# Altium PCB 起跑突击V4.0.PcbDoc
Units mm, origin at the board's own origin, x right, y up, seen from the top; angles counter-clockwise.
Board outline 152.4 x 101.6 mm, 2 copper layers (Top Layer, Bottom Layer); 9 components, 6 nets, 28 pads, 1 vias.
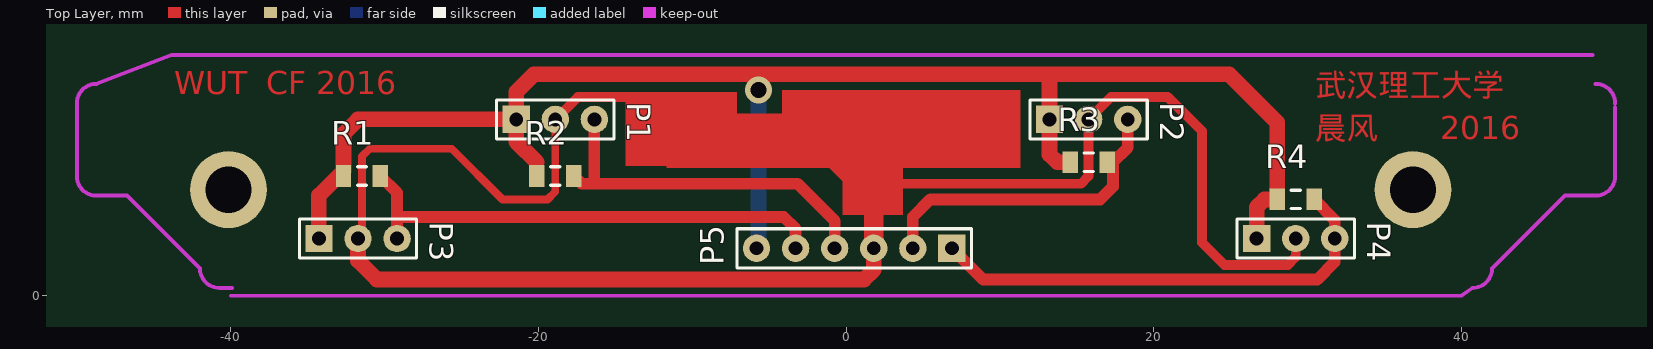
[diagram p0: Top Layer view]
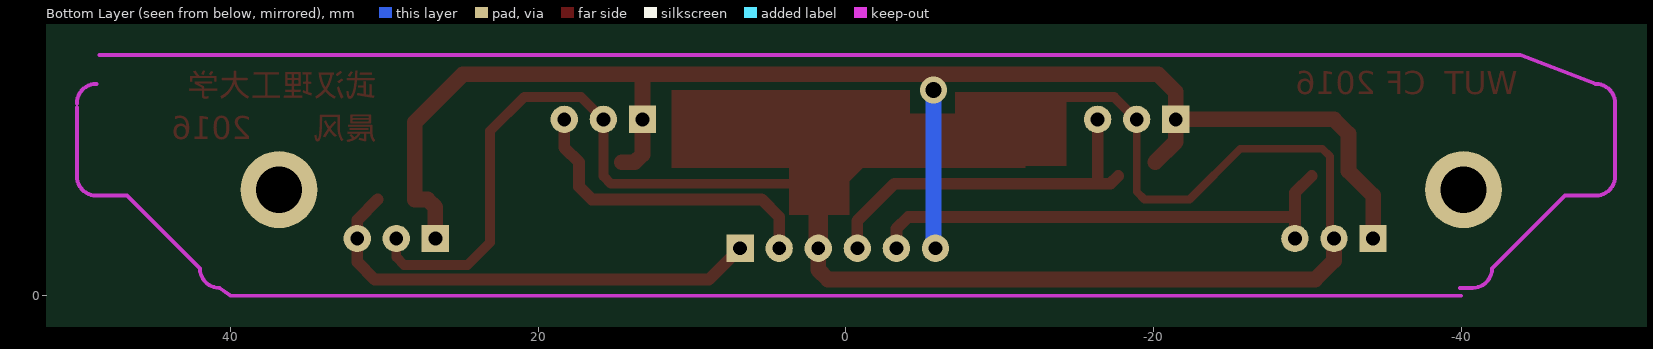
[diagram p1: Bottom Layer view, seen from below]

## Layer stack, top to bottom
Top Layer: signal copper 0.0356
Dielectric: dielectric 0.32, FR-4, Dk 4.8
Bottom Layer: signal copper 0.0356

## Board outline
-83.033,-32.218 69.367,-32.218 69.367,69.382 -83.033,69.382

## Design rules (kind name [scope] priority, off if disabled: settings)
Clearance [All] p1: gap=0.254
PolygonConnect [All] p1: connectstyle=Relief reliefconductorwidth=0.254 reliefentries=4 polygonreliefangle="90 Angle" airgapwidth=0.254
RoutingVias [All] p1: holewidth=0.711 width=1.27 viastyle="Through Hole" minholewidth=0.711 minwidth=1.27 maxholewidth=0.711 maxwidth=1.27
SolderMaskExpansion [All] p1: expansion=0.102
Width [All] p1: maxlimit=1.27 minlimit=0.508 preferedwidth=0.762 minimp=50.000000 maximp=50.000000 favimp=50.000000
28 further rules are at their usual default settings.

## Components (designator, comment, footprint, x,y, rotation, side; value= is the part's Value field where it differs from the comment)
P1 "Header 3" HDR1X3 -21.438,11.47 r0 top
P2 "Header 3" HDR1X3 13.233,11.47 r0 top
P3 "Header 3" HDR1X3 -34.265,3.723 r0 top
P4 "Header 3" HDR1X3 26.695,3.723 r0 top
P5 "Header 6" HDR1X6 6.883,3.088 r180 top
R1 "Res" R2012 -31.471,7.787 r0 top
R2 "Res" R2012 -18.898,7.787 r0 top
R3 "Res" R2012 15.773,8.676 r0 top
R4 "Res" R2012 29.235,6.263 r0 top

## Footprints (in the part's own frame and the unit in brackets; to place one, negate y for a bottom-side part, rotate by r counter-clockwise, add the part's x,y. Pads: shape width x height; smd on the part's side, far side on the other; paste and mask are expansions set on the pad)
HDR1X3 [mil] "Connector; Header; 3 Position"
  rect 70x70 hole 35.43: 1(0,0)
  round 70 hole 35.43: 2(100,0) 3(200,0)
  silkscreen extent -50,-50 250,50, body extent -50,-50 250,50, height 298
HDR1X6 [mil] "Connector; Header; 6 Position"
  rect 70x70 hole 35.43: 1(0,0)
  round 70 hole 35.43: 2(100,0) 3(200,0) 4(300,0) 5(400,0) 6(500,0)
  silkscreen extent -50,-50 550,50, body extent -50,-50 550,50, height 298
R2012 [mm] "Chip Resistor, 2-Leads, Body 2.0x1.2mm, IPC Low Density"
  rect 1x1.4 smd: 1(-1.2,0) 2(1.2,0)
  silkscreen extent -0.3,-0.6 0.3,0.6, body extent -0.98,-0.6 1.02,0.6, height 0.5

## Part data
P1 P2 P3 P4: "Header, 3-Pin"
P5: "Header, 6-Pin"
R1 R2 R3 R4: "贴片电阻"

## Free pads (board coordinates)
  round 5 hole 3: 0(36.855,6.898) 1(-40.145,6.898)

## Via types
v1: diameter 1.778, hole 1.016, Top Layer to Bottom Layer, 1 vias

## Nets (pads, with @x,y where several pads share a name; then routed paths per layer and width w, separated by ;. In a path a pad name is that pad's centre, name@x,y a point inside that pad or via, vN(x,y) a via of type N, cw(c..) or ccw(c..) an arc to the next point about the centre after c; other vN are vias at no path point)
GND: P1.2 P2.2 P3.2 P4.2 P5.3 | length 131.3
  Top Layer w0.508: P3.2 -31.471,3.977 -31.471,9.057 -30.963,9.565 -25.629,9.565 -22.327,6.263 -19.406,6.263 -18.898,6.771 P1.2
  Top Layer w0.635: P1.2 -17.437,12.931 -14.135,12.931 -11.278,10.073 -2.388,10.073 1.803,5.882 3.2,7.279 15.274,7.279 15.773,7.778 P2.2 17.234,12.931 20.917,12.931 23.139,10.708 23.139,3.469 24.6,2.009 28.727,2.009 29.235,2.517 P4.2
  Top Layer w1.016: P3.2 -31.725,2.286 -30.495,1.056 1.168,1.056 1.803,1.691 P5.3
  Top Layer w1.27: P5.3 1.803,5.882
IO1: P3.3 P5.5 R1.2 | length 32
  Top Layer w0.762: R1.2 -29.185,6.701 -29.185,5.12 ; P3.3 -29.185,5.12 ; P5.5 -3.277,4.358 -4.039,5.12 -29.185,5.12
IO2: P1.3 P5.4 R2.2 | length 23.9
  Top Layer w0.762: R2.2 -17.19,7.279 -3.15,7.279 -0.737,4.866 P5.4 ; -16.358,7.533 P1.3
IO3: P2.3 P5.2 R3.2 | length 20.6
  Top Layer w0.762: P5.2 4.343,5.12 5.486,6.263 16.535,6.263 17.354,7.082 17.354,8.676 18.313,9.635 P2.3
IO4: P4.3 P5.1 R4.2 | length 30.8
  Top Layer w0.762: P5.1 8.915,1.056 30.632,1.056 31.775,2.199 P4.3 31.775,4.923 R4.2
VCC: P1.1 P2.1 P3.1 P4.1 P5.6 R1.1 R2.1 R3.1 R4.1 | length 101.1
  Top Layer w1.016: P3.1 -34.265,6.517 -32.671,8.111 -32.671,10.524 -31.725,11.47 P1.1 ; -20.098,8.676 -21.438,10.016 P1.1 ; R3.1 13.741,8.676 13.233,9.184 P2.1 13.233,14.391 ; P4.1 26.695,5.755 27.203,6.263 R4.1 28.035,11.273 24.917,14.391 13.233,14.391 ; P1.1 -21.438,13.248 -20.295,14.391 13.233,14.391
  Bottom Layer w1.016: P5.6 -5.69,3.215 v1(-5.69,13.375)

## Keep-outs
Keep-Out Layer:
  lines w0.254: -40,0 40,0 40.73,0.508 ccw(c40.73,1.778) 42,1.778 46.73,6.508 48.73,6.508 ccw(c48.73,7.778) 50,7.778 50,8.778 50,12.258 ; -39.903,0.508 -40.73,0.508 cw(c-40.73,1.778) -42,1.778 -46.73,6.508 -48.73,6.508 cw(c-48.73,7.778) -50,7.778 -50,12.511 cw(c-48.73,12.511) -48.73,13.781 -43.823,15.661 48.539,15.661 ; 48.73,13.781 cw(c48.73,12.511) 50,12.511

## Other copper
Top Layer:
  rectangle net GND: -14.326,8.422 -7.087,13.248
  rectangle net GND: -4.166,11.597 11.328,13.375
  rectangle net GND: -0.229,5.247 3.708,9.311
  rectangle net GND: -11.659,8.295 11.328,11.851
  text "WUT" at -43.663,12.613 h2.54
  text "CF 2016" at -37.694,12.613 h2.54
  text "武汉理工大学" at 30.505,12.486 h2.54
  text "晨风" at 30.505,9.692 h2.54
  text "2016" at 38.633,9.692 h2.54

## Silkscreen, mask and mechanical layers (free items; w line width, h text height)
Mechanical 15:
  lines w0.254: -45,-2.286 45,-2.286 ; -12,-5.715 12,-5.715